# Altium PCB PCB1.PcbDoc
Units mil, origin at the board's own origin, x right, y up, seen from the top; angles counter-clockwise.
Board outline 1164.1 x 2610.03 mil, 2 copper layers (Top Layer, Bottom Layer), stack 60.4 mil thick; 2 components, 80 nets, 165 pads, 0 vias.
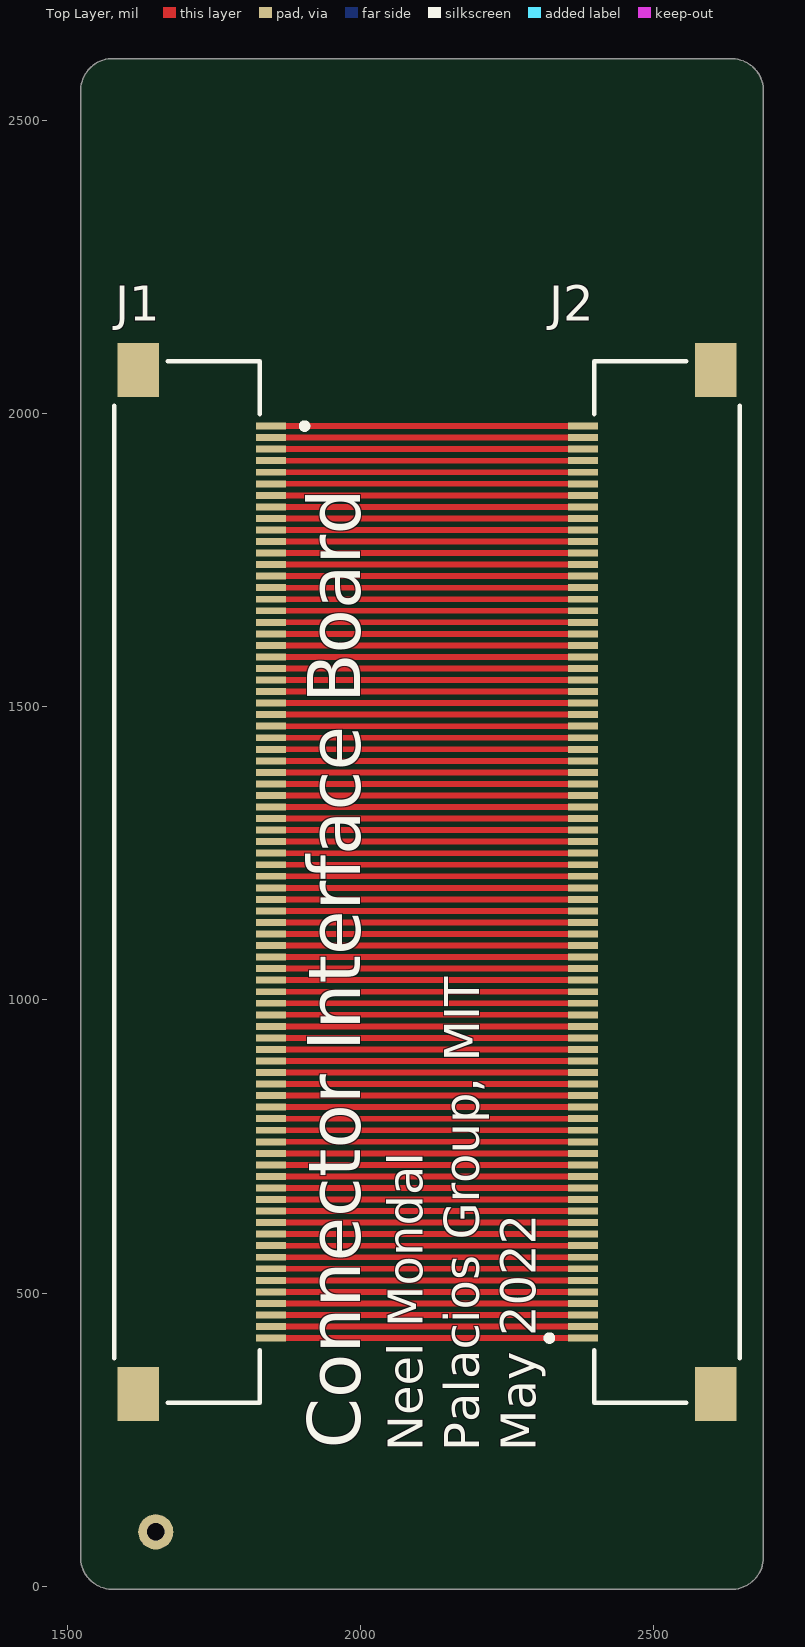
[diagram p0: Top Layer view]
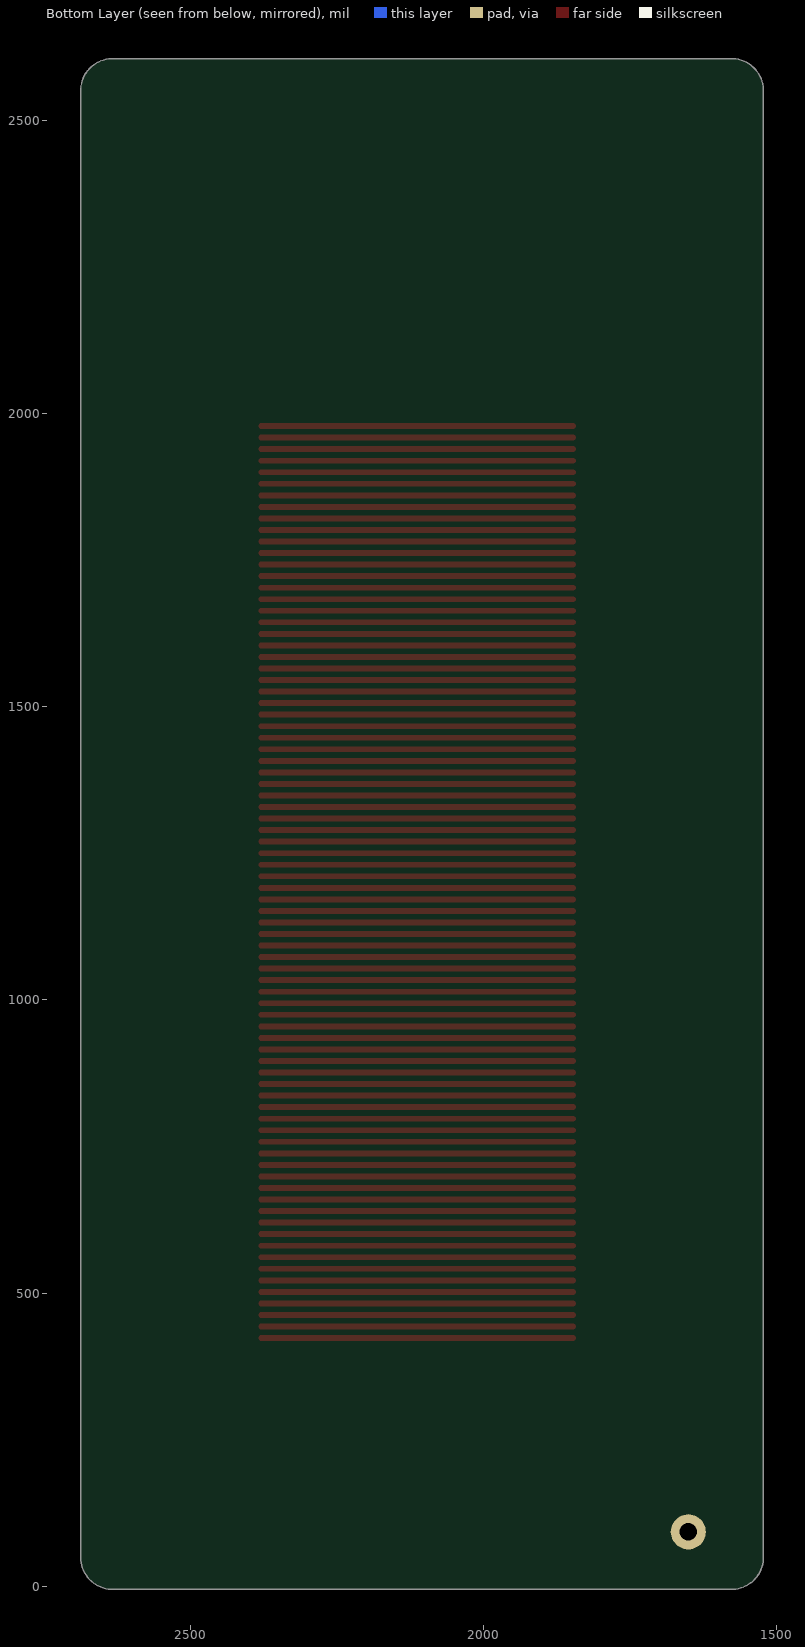
[diagram p1: Bottom Layer view, seen from below]

## Layer stack, top to bottom
Top Solder: solder mask 0.5, Solder Resist, Dk 3.3
Top Layer: signal copper 0.7
Dielectric1: core 59, FR-4, Dk 4.3
Bottom Layer: signal copper 0.7
Bottom Solder: solder mask 0.5, Solder Resist, Dk 3.3

## Board outline
1523.11,47.9 cw(c1528,49) 1522.99,49 1522.99,2547.89 cw(c1577.4,2550.61) 1574.54,2605.01 cw(c1574.81,2600) 1575.09,2605.01 cw(c1575.37,2600) 1575.37,2605.01 2629.89,2605.01 cw(c2632.61,2550.6) 2687.01,2553.46 cw(c2682,2553.19) 2687.02,2553.19 cw(c2682,2553.19) 2687.01,2553.12 2687.01,52.11 cw(c2632.6,49.39) 2687.08,49.39 cw(c2632.6,49.39) 2635.46,-5.01 cw(c2635.19,0) 2635.12,-5.02 1580.11,-5.02 cw(c1577.39,49.4) 1522.99,46.54 cw(c1528,46.81)

## Design rules (kind name [scope] priority, off if disabled: settings)
Clearance [All] p1: gap=8 ignorepadtopadclearanceinfootprint=TRUE
DiffPairsRouting [All] p1: maxlimit=10 minlimit=10 mostfreqgap=10 toplayer_minwidth=10 toplayer_maxwidth=10 toplayer_prefwidth=10 bottomlayer_minwidth=10 bottomlayer_maxwidth=10 bottomlayer_prefwidth=10 maxuncoupledlength=500
HoleSize [All] p1: absolutevalues=TRUE maxlimit=300 minlimit=10 maxpercent=80.000 minpercent=20.000
MinimumAnnularRing [All] p1: minimumring=10
MinimumSolderMaskSliver [All] p1: minsoldermaskwidth=6
PasteMaskExpansion [All] p1: expansion=10
PlaneClearance [All] p1: clearance=15
PlaneConnect [All] p1: pad.planeconnectstyle=Relief pad.reliefexpansion=20 pad.reliefentries=4 pad.reliefconductorwidth=10 pad.reliefairgap=10 via.planeconnectstyle=Direct via.reliefexpansion=20 via.reliefentries=4 via.reliefconductorwidth=10 via.reliefairgap=10
PolygonConnect [All] p1: thpad.connectstyle=Relief thpad.reliefconductorwidth=10 thpad.reliefentries=4 thpad.polygonreliefangle="90 Angle" thpad.airgapwidth=10 smdpad.connectstyle=Relief smdpad.reliefconductorwidth=10 smdpad.reliefentries=4 smdpad.polygonreliefangle="90 Angle" smdpad.airgapwidth=10 via.connectstyle=Direct via.reliefconductorwidth=10 via.reliefentries=4 via.polygonreliefangle="90 Angle" via.airgapwidth=10
RoutingVias [All] p1: holewidth=10 width=20 viastyle="Through Hole" minholewidth=10 minwidth=20 maxholewidth=10 maxwidth=20
SMDNeckDown [All] p1: percent=100.000
SilkToSilkClearance [All] p1: silktosilkclearance=0
SilkToSolderMaskClearance SilkscreenOverComponentPads [IsPad] p1: minsilkscreentomaskgap=10 clearancetoexposedcopper=TRUE
SolderMaskExpansion [All] p1: expansion=10 istentingtop=FALSE
Width [All] p1: maxlimit=10 minlimit=10 preferedwidth=10
22 further rules are at their usual default settings.

## Components (designator, comment, footprint, x,y, rotation, side; value= is the part's Value field where it differs from the comment)
J1 "FH28H-80S-0.5SH(05)" FP-FH28H-80S-0_5SH_05-MFG 1704,1201 r90 top
J2 "FH28H-80S-0.5SH(05)" FP-FH28H-80S-0_5SH_05-MFG 2523,1201 r270 top

## Footprints (in the part's own frame and the unit in brackets; to place one, negate y for a bottom-side part, rotate by r counter-clockwise, add the part's x,y. Pads: shape width x height; smd on the part's side, far side on the other; paste and mask are expansions set on the pad)
FP-FH28H-80S-0_5SH_05-MFG [mm]
  rect 0.3x1.3 smd paste-1000 mask+0: 1(19.75,-3.65) 2(19.25,-3.65) 3(18.75,-3.65) 4(18.25,-3.65) 5(17.75,-3.65) 6(17.25,-3.65) 7(16.75,-3.65) 8(16.25,-3.65) 9(15.75,-3.65) 10(15.25,-3.65) 11(14.75,-3.65) 12(14.25,-3.65) 13(13.75,-3.65) 14(13.25,-3.65) 15(12.75,-3.65) 16(12.25,-3.65) 17(11.75,-3.65) 18(11.25,-3.65) 19(10.75,-3.65) 20(10.25,-3.65) 21(9.75,-3.65) 22(9.25,-3.65) 23(8.75,-3.65) 24(8.25,-3.65) 25(7.75,-3.65) 26(7.25,-3.65) 27(6.75,-3.65) 28(6.25,-3.65) 29(5.75,-3.65) 30(5.25,-3.65) 31(4.75,-3.65) 32(4.25,-3.65) 33(3.75,-3.65) 34(3.25,-3.65) 35(2.75,-3.65) 36(2.25,-3.65) 37(1.75,-3.65) 38(1.25,-3.65) 39(0.75,-3.65) 40(0.25,-3.65) 41(-0.25,-3.65) 42(-0.75,-3.65) 43(-1.25,-3.65) 44(-1.75,-3.65) 45(-2.25,-3.65) 46(-2.75,-3.65) 47(-3.25,-3.65) 48(-3.75,-3.65) 49(-4.25,-3.65) 50(-4.75,-3.65) 51(-5.25,-3.65) 52(-5.75,-3.65) 53(-6.25,-3.65) 54(-6.75,-3.65) 55(-7.25,-3.65) 56(-7.75,-3.65) 57(-8.25,-3.65) 58(-8.75,-3.65) 59(-9.25,-3.65) 60(-9.75,-3.65) 61(-10.25,-3.65) 62(-10.75,-3.65) 63(-11.25,-3.65) 64(-11.75,-3.65) 65(-12.25,-3.65) 66(-12.75,-3.65) 67(-13.25,-3.65) 68(-13.75,-3.65) 69(-14.25,-3.65) 70(-14.75,-3.65) 71(-15.25,-3.65) 72(-15.75,-3.65) 73(-16.25,-3.65) 74(-16.75,-3.65) 75(-17.25,-3.65) 76(-17.75,-3.65) 77(-18.25,-3.65) 78(-18.75,-3.65) 79(-19.25,-3.65) 80(-19.75,-3.65)
  rect 2.35x1.8 smd paste+0 mask+0: 81(-22.175,2.1) 82(22.175,2.1)
  silkscreen extent -22.55,-5.23 22.55,3.15, body extent -23.45,-4.4 23.45,3.25, height 0.25

## Part data
J1 J2: library part CMP-11609-000031-1, "CONN FFC BOTTOM 80POS 0.50MM R/A", Contact Resistance=50mR, Current Rating=500mA, Flammability Rating="UL94 V-0", Housing Color=Grey, Insulation Resistance=500MR, Max Operating Temperature=85°C, Max Voltage Rating (AC)=50V, Min Operating Temperature=-40°C, Package Quantity=1, Actuator Material=Polymer, Contact Material=Bronze, Contact Plating=Gold, Depth=6.5mm, Gender=Receptacle, Housing Material=Polymer, Lead Pitch=0.5mm, Length=44.9mm, Mating Cycles=20, Max Current Rating=500mA, Mount="Surface Mount", Number of Contacts=80, Number of Positions=80, Number of Rows=1, Orientation="Right Angle", Packaging="Tape and Reel", Pitch=0.5mm, Radiation Hardening=No, REACH SVHC="No SVHC", RoHS Compliant=Yes, Series=FH28, Termination=Solder, Voltage Rating=50V

## Free pads (board coordinates)
  round 60 hole 30: 2(1651,93)

## Nets (pads, with @x,y where several pads share a name; then routed paths per layer and width w, separated by ;. In a path a pad name is that pad's centre, name@x,y a point inside that pad or via, vN(x,y) a via of type N, cw(c..) or ccw(c..) an arc to the next point about the centre after c; other vN are vias at no path point)
NetJ1_1: J1.1 J2.80 | length 531.6
  Top Layer w10: J1.1 J2.80
NetJ1_2: J1.2 J2.79 | length 531.6
  Top Layer w10: J1.2 J2.79
NetJ1_3: J1.3 J2.78 | length 531.6
  Top Layer w10: J1.3 J2.78
NetJ1_4: J1.4 J2.77 | length 531.6
  Top Layer w10: J1.4 J2.77
NetJ1_5: J1.5 J2.76 | length 531.6
  Top Layer w10: J1.5 J2.76
NetJ1_6: J1.6 J2.75 | length 531.6
  Top Layer w10: J1.6 J2.75
NetJ1_7: J1.7 J2.74 | length 531.6
  Top Layer w10: J1.7 J2.74
NetJ1_8: J1.8 J2.73 | length 531.6
  Top Layer w10: J1.8 J2.73
NetJ1_9: J1.9 J2.72 | length 531.6
  Top Layer w10: J1.9 J2.72
NetJ1_10: J1.10 J2.71 | length 531.6
  Top Layer w10: J1.10 J2.71
NetJ1_11: J1.11 J2.70 | length 531.6
  Top Layer w10: J1.11 J2.70
NetJ1_12: J1.12 J2.69 | length 531.6
  Top Layer w10: J1.12 J2.69
NetJ1_13: J1.13 J2.68 | length 531.6
  Top Layer w10: J1.13 J2.68
NetJ1_14: J1.14 J2.67 | length 531.6
  Top Layer w10: J1.14 J2.67
NetJ1_15: J1.15 J2.66 | length 531.6
  Top Layer w10: J1.15 J2.66
NetJ1_16: J1.16 J2.65 | length 531.6
  Top Layer w10: J1.16 J2.65
NetJ1_17: J1.17 J2.64 | length 531.6
  Top Layer w10: J1.17 J2.64
NetJ1_18: J1.18 J2.63 | length 531.6
  Top Layer w10: J1.18 J2.63
NetJ1_19: J1.19 J2.62 | length 531.6
  Top Layer w10: J1.19 J2.62
NetJ1_20: J1.20 J2.61 | length 531.6
  Top Layer w10: J1.20 J2.61
NetJ1_21: J1.21 J2.60 | length 531.6
  Top Layer w10: J1.21 J2.60
NetJ1_22: J1.22 J2.59 | length 531.6
  Top Layer w10: J1.22 J2.59
NetJ1_23: J1.23 J2.58 | length 531.6
  Top Layer w10: J1.23 J2.58
NetJ1_24: J1.24 J2.57 | length 531.6
  Top Layer w10: J1.24 J2.57
NetJ1_25: J1.25 J2.56 | length 531.6
  Top Layer w10: J1.25 J2.56
NetJ1_26: J1.26 J2.55 | length 531.6
  Top Layer w10: J1.26 J2.55
NetJ1_27: J1.27 J2.54 | length 531.6
  Top Layer w10: J1.27 J2.54
NetJ1_28: J1.28 J2.53 | length 531.6
  Top Layer w10: J1.28 J2.53
NetJ1_29: J1.29 J2.52 | length 531.6
  Top Layer w10: J1.29 J2.52
NetJ1_30: J1.30 J2.51 | length 531.6
  Top Layer w10: J1.30 J2.51
NetJ1_31: J1.31 J2.50 | length 531.6
  Top Layer w10: J1.31 J2.50
NetJ1_32: J1.32 J2.49 | length 531.6
  Top Layer w10: J1.32 J2.49
NetJ1_33: J1.33 J2.48 | length 531.6
  Top Layer w10: J1.33 J2.48
NetJ1_34: J1.34 J2.47 | length 531.6
  Top Layer w10: J1.34 J2.47
NetJ1_35: J1.35 J2.46 | length 531.6
  Top Layer w10: J1.35 J2.46
NetJ1_36: J1.36 J2.45 | length 531.6
  Top Layer w10: J1.36 J2.45
NetJ1_37: J1.37 J2.44 | length 531.6
  Top Layer w10: J1.37 J2.44
NetJ1_38: J1.38 J2.43 | length 531.6
  Top Layer w10: J1.38 J2.43
NetJ1_39: J1.39 J2.42 | length 531.6
  Top Layer w10: J1.39 J2.42
NetJ1_40: J1.40 J2.41 | length 531.6
  Top Layer w10: J1.40 J2.41
NetJ1_41: J1.41 J2.40 | length 531.6
  Top Layer w10: J1.41 J2.40
NetJ1_42: J1.42 J2.39 | length 531.6
  Top Layer w10: J1.42 J2.39
NetJ1_43: J1.43 J2.38 | length 531.6
  Top Layer w10: J1.43 J2.38
NetJ1_44: J1.44 J2.37 | length 531.6
  Top Layer w10: J1.44 J2.37
NetJ1_45: J1.45 J2.36 | length 531.6
  Top Layer w10: J1.45 J2.36
NetJ1_46: J1.46 J2.35 | length 531.6
  Top Layer w10: J1.46 J2.35
NetJ1_47: J1.47 J2.34 | length 531.6
  Top Layer w10: J1.47 J2.34
NetJ1_48: J1.48 J2.33 | length 531.6
  Top Layer w10: J1.48 J2.33
NetJ1_49: J1.49 J2.32 | length 531.6
  Top Layer w10: J1.49 J2.32
NetJ1_50: J1.50 J2.31 | length 531.6
  Top Layer w10: J1.50 J2.31
NetJ1_51: J1.51 J2.30 | length 531.6
  Top Layer w10: J1.51 J2.30
NetJ1_52: J1.52 J2.29 | length 531.6
  Top Layer w10: J1.52 J2.29
NetJ1_53: J1.53 J2.28 | length 531.6
  Top Layer w10: J1.53 J2.28
NetJ1_54: J1.54 J2.27 | length 531.6
  Top Layer w10: J1.54 J2.27
NetJ1_55: J1.55 J2.26 | length 531.6
  Top Layer w10: J1.55 J2.26
NetJ1_56: J1.56 J2.25 | length 531.6
  Top Layer w10: J1.56 J2.25
NetJ1_57: J1.57 J2.24 | length 531.6
  Top Layer w10: J1.57 J2.24
NetJ1_58: J1.58 J2.23 | length 531.6
  Top Layer w10: J1.58 J2.23
NetJ1_59: J1.59 J2.22 | length 531.6
  Top Layer w10: J1.59 J2.22
NetJ1_60: J1.60 J2.21 | length 531.6
  Top Layer w10: J1.60 J2.21
NetJ1_61: J1.61 J2.20 | length 531.6
  Top Layer w10: J1.61 J2.20
NetJ1_62: J1.62 J2.19 | length 531.6
  Top Layer w10: J1.62 J2.19
NetJ1_63: J1.63 J2.18 | length 531.6
  Top Layer w10: J1.63 J2.18
NetJ1_64: J1.64 J2.17 | length 531.6
  Top Layer w10: J1.64 J2.17
NetJ1_65: J1.65 J2.16 | length 531.6
  Top Layer w10: J1.65 J2.16
NetJ1_66: J1.66 J2.15 | length 531.6
  Top Layer w10: J1.66 J2.15
NetJ1_67: J1.67 J2.14 | length 531.6
  Top Layer w10: J1.67 J2.14
NetJ1_68: J1.68 J2.13 | length 531.6
  Top Layer w10: J1.68 J2.13
NetJ1_69: J1.69 J2.12 | length 531.6
  Top Layer w10: J1.69 J2.12
NetJ1_70: J1.70 J2.11 | length 531.6
  Top Layer w10: J1.70 J2.11
NetJ1_71: J1.71 J2.10 | length 531.6
  Top Layer w10: J1.71 J2.10
NetJ1_72: J1.72 J2.9 | length 531.6
  Top Layer w10: J1.72 J2.9
NetJ1_73: J1.73 J2.8 | length 531.6
  Top Layer w10: J1.73 J2.8
NetJ1_74: J1.74 J2.7 | length 531.6
  Top Layer w10: J1.74 J2.7
NetJ1_75: J1.75 J2.6 | length 531.6
  Top Layer w10: J1.75 J2.6
NetJ1_76: J1.76 J2.5 | length 531.6
  Top Layer w10: J1.76 J2.5
NetJ1_77: J1.77 J2.4 | length 531.6
  Top Layer w10: J1.77 J2.4
NetJ1_78: J1.78 J2.3 | length 531.6
  Top Layer w10: J1.78 J2.3
NetJ1_79: J1.79 J2.2 | length 531.6
  Top Layer w10: J1.79 J2.2
NetJ1_80: J1.80 J2.1 | length 531.6
  Top Layer w10: J1.80 J2.1
pads on no net: J1.81 J1.82 J2.81 J2.82

## Silkscreen, mask and mechanical layers (free items; w line width, h text height)
Top Overlay:
  text "Connector Interface Board" at 2000,235 h90 r90
  text "Neel Mondal" at 2106,230 h60 r90
  text "Palacios Group, MIT" at 2203.01,230 h60 r90
  text "May 2022" at 2299.01,230 h60 r90
Board:
  lines w10: 1528,46.81 ccw(c1577.39,49.4) 1579.98,0 ; 1528,49 1528,2548 cw(c1577.4,2550.61) 1574.81,2600 ; 1575.37,2600 2630,2600 cw(c2632.61,2550.6) 2682,2553.19 2682,51.05 ; 1577,0 2635.19,0 ccw(c2632.6,49.39) 2682,51.98